# Altium PCB Layout.PcbDoc
Units mil, origin at the board's own origin, x right, y up, seen from the top; angles counter-clockwise.
Board outline 3898.62 x 1890.75 mil, 2 copper layers (Top Layer, Bottom Layer); 102 components, 77 nets, 341 pads, 90 vias.
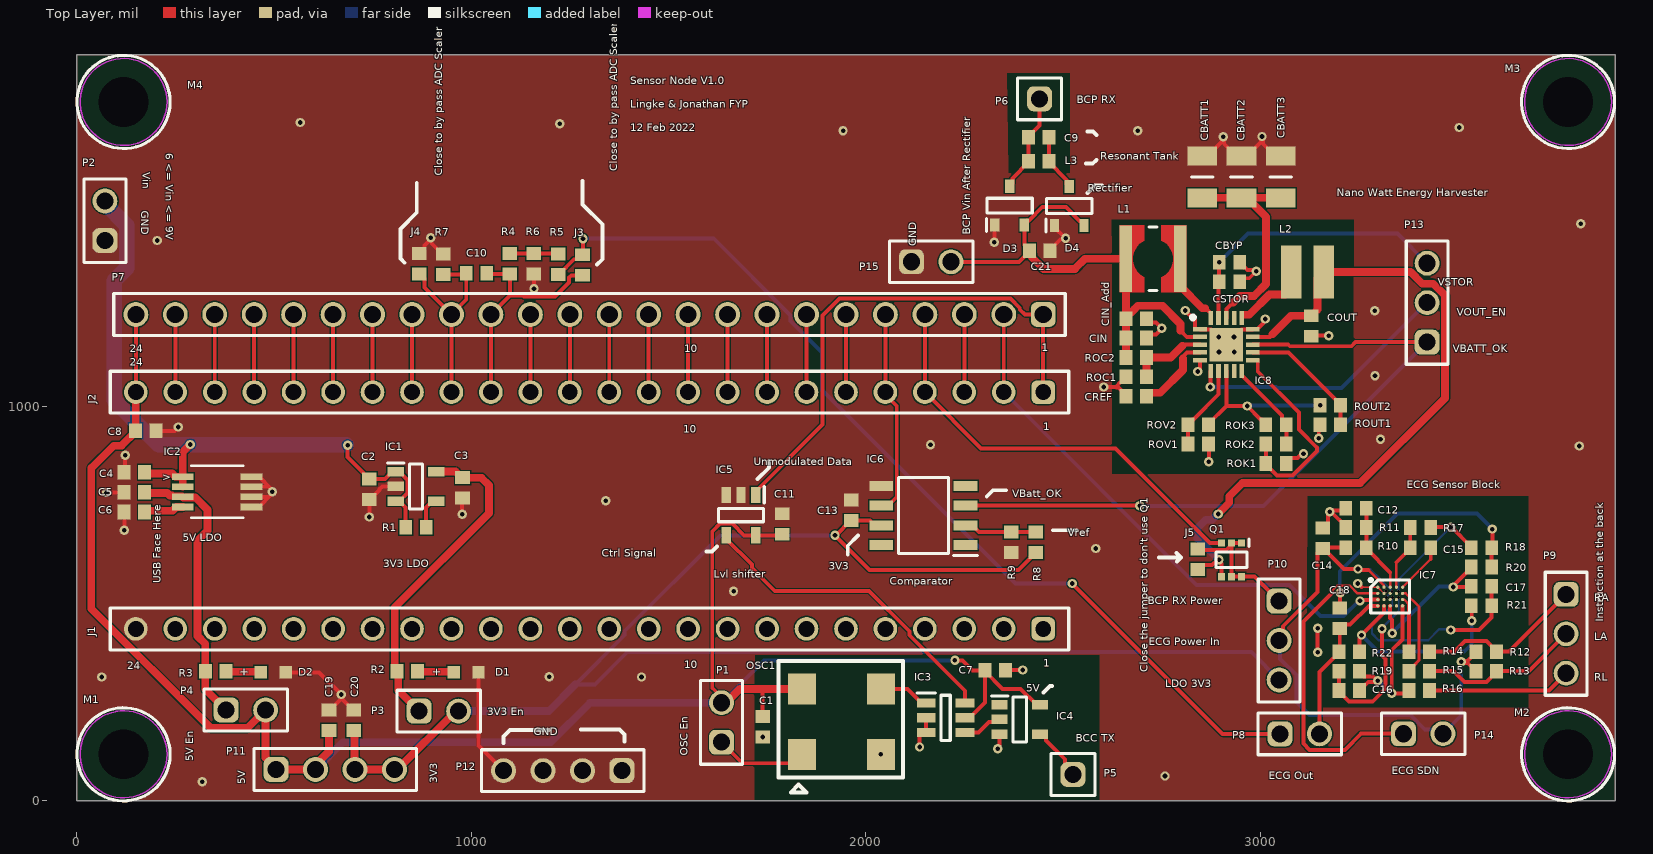
[diagram p0: Top Layer view]
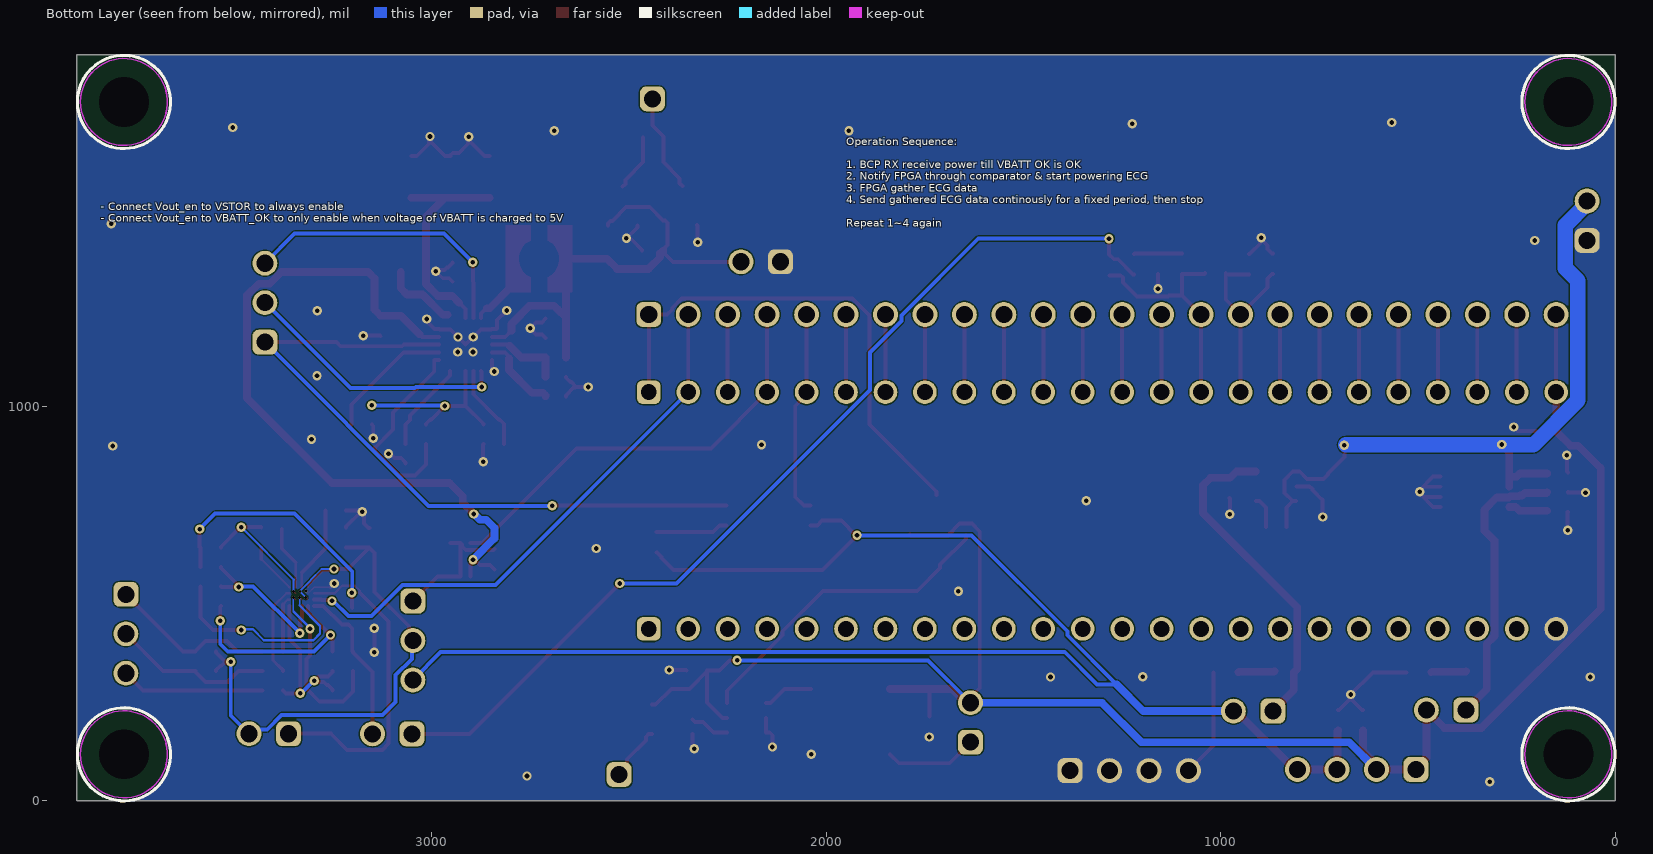
[diagram p1: Bottom Layer view, seen from below]
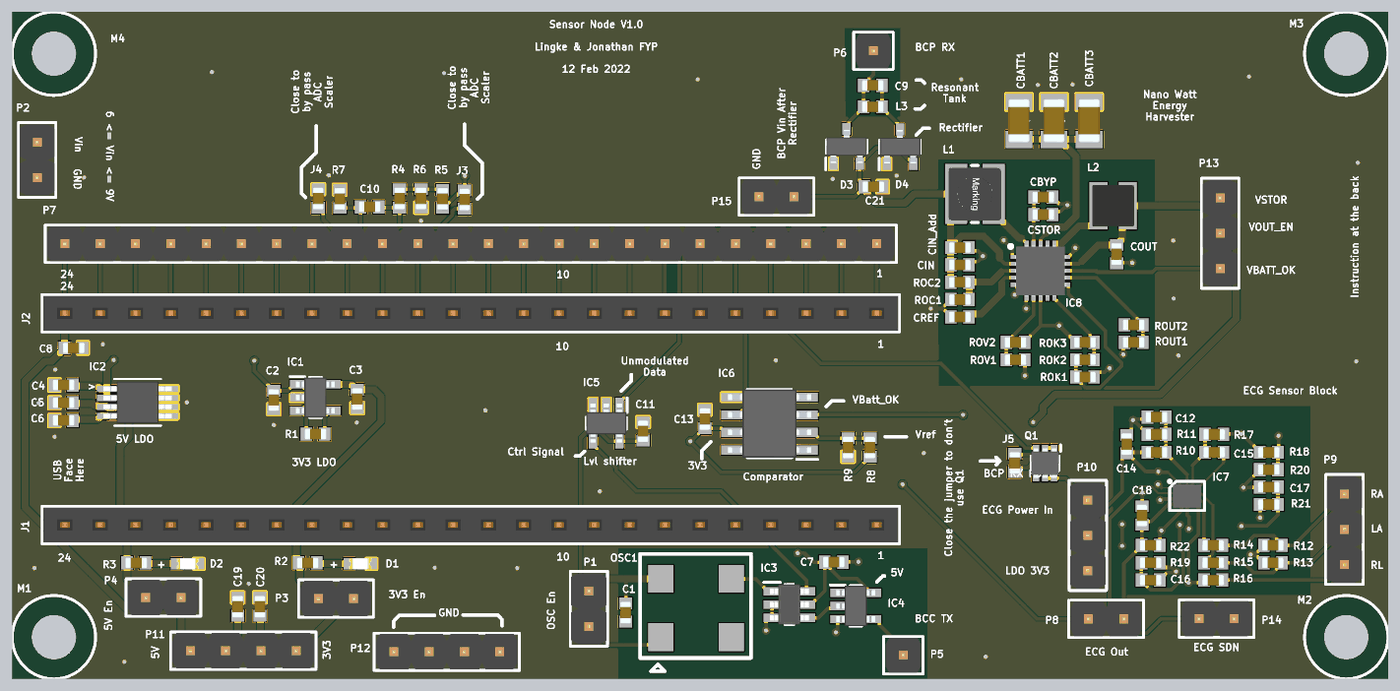
[diagram p2: 3D render of the assembled board from above, using the file's embedded part models]

## Layer stack, top to bottom
Top Solder: solder mask 0.4, Solder Resist, Dk 3.5
Top Layer: signal copper 1.4
Dielectric 1: dielectric 12.6, FR-4, Dk 4.8
Bottom Layer: signal copper 1.4
Bottom Solder: solder mask 0.4, Solder Resist, Dk 3.5

## Board outline
0,1890.75 3898.62,1890.75 3898.62,0 0,0

## Design rules (kind name [scope] priority, off if disabled: settings)
Clearance [All] p1: gap=3 ignorepadtopadclearanceinfootprint=TRUE
HoleSize [All] p1: absolutevalues=TRUE maxlimit=393.7 minlimit=1 maxpercent=80.000 minpercent=20.000
HoleToHoleClearance [All] p1: gap=3.94 allowstackedmicrovias=TRUE
MinimumSolderMaskSliver [All] p1: minsoldermaskwidth=3
PolygonConnect [All] p1: connectstyle=Direct reliefconductorwidth=10 reliefentries=4 polygonreliefangle="90 Angle" airgapwidth=10
RoutingVias [All] p1: holewidth=28 width=50 viastyle="Through Hole" minholewidth=3.94 minwidth=7.87 maxholewidth=28 maxwidth=50
SilkToSilkClearance [All] p1: silktosilkclearance=3.94
SilkToSolderMaskClearance [IsPad] p1: minsilkscreentomaskgap=3.94 clearancetoexposedcopper=TRUE
SolderMaskExpansion [All] p1: expansion=4 istentingtop=FALSE
Width [All] p1: maxlimit=100 minlimit=3 preferedwidth=10
25 further rules are at their usual default settings.

## Components (designator, comment, footprint, x,y, rotation, side; value= is the part's Value field where it differs from the comment)
C1 "0.1uF" 0603 1738.22,187.99 r90 top
C2 "1uF" 0603 741.17,790.35 r270 top
C3 "1uF" 0603 977.33,793.31 r270 top
C4 "1uF" 0603 145.67,832.68 r180 top
C5 "4.7uF" 0603 145.67,782.48 r180 top
C6 "470pF" 0603 145.67,732.28 r180 top
C7 "0.1uF" 0603 2327.76,330.71 r180 top
C8 "0.1uF" 0603 174.21,937.99 r180 top
C9 "220pF" 0603 2437.99,1682.09 r180 top
C10 "1nF" 0603 1012.8,1337.6 r0 top
C11 "0.1uF" 0603 1787.4,701.77 r270 top
C12 "0.1uF" 0603 3242.13,742.13 r0 top
C13 "0.1uF" 0603 1962.6,736.22 r270 top
C14 "0.1uF" 0603 3157.51,665.35 r270 top
C15 "3.3uF" 0603 3405.51,642.1 r0 top
C16 "1nF" 0603 3225.39,279.89 r0 top
C17 "5.6nF" 0603 3560.04,543.67 r180 top
C18 "5.6nF" 0603 3200.79,462.96 r90 top
C19 "0.1uF" 0603 638.78,204.72 r90 top
C20 "0.1uF" 0603 701.77,204.72 r90 top
C21 "0.1uF" 0603 2439.96,1394.69 r0 top
CBATT1 "220uF" 1206 2852.36,1581.69 r90 top
CBATT2 "220uF" 1206 2951.8,1581.69 r90 top
CBATT3 "220uF" 1206 3051.18,1581.69 r90 top
CBYP "0.01uF" 0603 2921.26,1365.16 r180 top
CIN "4.7uF" 0603 2685.04,1173.23 r180 top
CIN_Add "0.1uF" 0603 2685.04,1222.44 r180 top
COUT "22uF" 0603 3128.94,1203.74 r270 top
CREF "10nF" 0603 2685.04,1025.59 r0 top
CSTOR "4.7uF" 0603 2921.26,1315.94 r180 top
D1 "Super Red, 1.9V" WL-SMCW_0603_H=0.7mm 986.22,325.98 r180 top
D2 "Super Red, 1.9V" WL-SMCW_0603_H=0.7mm 497.21,325.98 r180 top
D3 "BAT54S_R1_00001" SOT95P240X110-3N 2364.04,1508.86 r90 top
D4 "BAT54S_R1_00001" SOT95P240X110-3N 2515.38,1507.87 r90 top
IC1 "3V3 LDO" SOT-23-5 859.25,797.24 r0 top
IC2 "5V LDO" MSOP-8_MS 355.31,783.46 r0 top
IC3 "TS5A3160DBVR" SOT-23-6 2201.77,210.63 r0 top
IC4 "SN74LVC1G34DBVRG4" SOT-23-5 2389.76,206.69 r0 top
IC5 "SN74LV1T32DBVRG4" SOT-23-5 1683.07,724.41 r270 top
IC6 "LTC6268IS8#PBF" SOIC127P599X175-8N 2145.67,723.43 r180 top
IC7 "AD8233ACBZ-R7" BGA20C40P5X4_204X170X56 3328.74,518.08 r0 top
IC8 "BQ25570RGRR" QFN50P350X350X100-21N-D 2913.39,1156.5 r0 top
J1 "61302411821" 61302411821 1299.21,436.02 r180 top
J2 "61302411821" 61302411821 1299.21,1036.02 r180 top
J3 "Jumper" 0603 1281.5,1358.27 r90 top
J4 "Jumper" 0603 867.13,1361.22 r90 top
J5 "Jumper" 0603 2840.55,612.2 r270 top
L1 "22uH, 0.51A" WE-TPC_3816 2727.36,1374.02 r270 top
L2 "10uH, 0.85A" WE-MAPI_3015 3119.09,1340.55 r0 top
L3 "75nH" 0603 2437.99,1621.06 r180 top
M1 "M3 Mounting Hole" "M3 Hole" 118.11,118.11 r0 top
M2 "M3 Mounting Hole" "M3 Hole" 3779.53,118.11 r0 top
M3 "M3 Mounting Hole" "M3 Hole" 3779.53,1771.65 r0 top
M4 "M3 Mounting Hole" "M3 Hole" 118.11,1771.65 r0 top
OSC1 "1Mhz Oscillator" CB3-3I-4M0000 1837.6,118.11 r0 top
P1 "61300211121" 61300211121 1633.86,198.82 r90 top
P2 "61300211121" 61300211121 70.87,1470.47 r90 top
P3 "61300211121" 61300211121 917.32,227.59 r0 top
P4 "61300211121" 61300211121 428.15,230.34 r0 top
P5 "61300111121" 61300111121 2524.61,66.93 r0 top
P6 "61300111121" 61300111121 2439.96,1779.53 r0 top
P7 "61302411121" 61302411121 1299.21,1232.87 r180 top
P8 "61300211121" 61300211121 3099.41,169.91 r0 top
P9 "61300311121" 61300311121 3774.61,423.62 r270 top
P10 "61300311121" 61300311121 3047.24,406.5 r270 top
P11 "61300411121" 61300411121 654.72,79.72 r0 top
P12 "61300411121" 61300411121 1231.3,76.77 r180 top
P13 "61300311121" 61300311121 3422.24,1262.8 r90 top
P14 "61300211121" 61300211121 3412.4,170.28 r0 top
P15 "61300211121" 61300211121 2165.35,1366.51 r0 top
Q1 "RAL025P01TCR" RAL025P01TCR 2926.18,611.22 r270 top
R1 "100k Ohm" 0603 859.25,693.9 r0 top
R2 "1k Ohm" 0603 837.2,328.74 r180 top
R3 "1k Ohm" 0603 351.38,328.74 r0 top
R4 "140 Ohm" 0603 1097.44,1361.22 r90 top
R5 "2.32K Ohm" 0603 1219.49,1360.24 r90 top
R6 "1K Ohm" 0603 1158.24,1361.22 r270 top
R7 "845 Ohm" 0603 928.18,1360.24 r90 top
R8 "10k Ohm" 0603 2430.12,655.51 r270 top
R9 "31.6k Ohm" 0603 2368.11,655.51 r270 top
R10 "10M Ohm" 0603 3242.13,642.1 r180 top
R11 "10M Ohm" 0603 3242.13,692.91 r0 top
R12 "10M Ohm" 0603 3571.85,378.32 r180 top
R13 "10M Ohm" 0603 3571.85,329.1 r180 top
R14 "150k Ohm" 0603 3402.56,378.32 r0 top
R15 "150k Ohm" 0603 3402.56,329.1 r0 top
R16 "300k Ohm" 0603 3402.56,279.89 r0 top
R17 "10M Ohm" 0603 3405.51,692.91 r180 top
R18 "499K Ohm" 0603 3560.04,642.1 r180 top
R19 "10M Ohm" 0603 3225.39,329.1 r0 top
R20 "1M Ohm" 0603 3560.04,592.88 r0 top
R21 "1M Ohm" 0603 3560.04,494.46 r180 top
R22 "1M Ohm" 0603 3225.39,378.32 r180 top
ROC1 "15M Ohm" 0603 2685.04,1074.8 r180 top
ROC2 "5M Ohm" 0603 2685.04,1124.02 r0 top
ROK1 "3.09M Ohm" 0603 3039.37,855.32 r180 top
ROK2 "3.32M Ohm" 0603 3039.37,904.53 r0 top
ROK3 "6.49M Ohm" 0603 3039.37,953.74 r180 top
ROUT1 "6.19M Ohm" 0603 3177.17,953.74 r180 top
ROUT2 "6.65M Ohm" 0603 3177.17,1002.95 r180 top
ROV1 "4.53M Ohm" 0603 2842.52,904.53 r0 top
ROV2 "8.45M Ohm" 0603 2842.52,953.74 r0 top

## Footprints (in the part's own frame and the unit in brackets; to place one, negate y for a bottom-side part, rotate by r counter-clockwise, add the part's x,y. Pads: shape width x height; smd on the part's side, far side on the other; paste and mask are expansions set on the pad)
0603 [mm]
  rect 0.83x0.94 smd: 1(-0.66,0) 2(0.66,0)
  body extent -0.8,-0.4 0.8,0.4, height 0.9
1206 [mm]
  rect 1.22x1.92 smd: 1(-1.35,0) 2(1.35,0)
  silkscreen extent 0,-0.7 0,0.7, body extent -1.6,-0.8 1.6,0.8, height 1.9
61300111121 [mm] "Pin Header, pitch 2.54 mm, THT, Vertical, single row, 1p"
  rrect50% 1.6x1.6 hole 1.1: 1(0,0)
  silkscreen extent -1.42,-1.35 1.42,1.35, body extent -1.27,-1.27 1.27,1.27, height 8.57
61300211121 [mm] "Pin Header, pitch 2.54 mm, THT, Vertical, single row, 2p"
  rrect50% 1.6x1.6 hole 1.1: 1(-1.27,0)
  round 1.6 hole 1.1: 2(1.27,0)
  silkscreen extent -2.69,-1.35 2.69,1.35, body extent -2.54,-1.27 2.54,1.27, height 8.57
61300311121 [mm] "Pin Header, pitch 2.54 mm, THT, Vertical, single row, 3p"
  rrect50% 1.6x1.6 hole 1.1: 1(-2.54,0)
  round 1.6 hole 1.1: 2(0,0) 3(2.54,0)
  silkscreen extent -3.96,-1.35 3.96,1.35, body extent -3.81,-1.27 3.81,1.27, height 8.57
61300411121 [mm] "Pin Header, pitch 2.54 mm, THT, Vertical, single row, 4p"
  rrect50% 1.6x1.6 hole 1.1: 1(-3.81,0)
  round 1.6 hole 1.1: 2(-1.27,0) 3(1.27,0) 4(3.81,0)
  silkscreen extent -5.23,-1.35 5.23,1.35, body extent -5.08,-1.27 5.08,1.27, height 8.57
61302411121 [mm] "Pin Header, pitch 2.54 mm, THT, Vertical, single row, 24p"
  rrect50% 1.6x1.6 hole 1.1: 1(-29.21,0)
  round 1.6 hole 1.1: 2(-26.67,0) 3(-24.13,0) 4(-21.59,0) 5(-19.05,0) 6(-16.51,0) 7(-13.97,0) 8(-11.43,0) 9(-8.89,0) 10(-6.35,0) 11(-3.81,0) 12(-1.27,0) 13(1.27,0) 14(3.81,0) 15(6.35,0) 16(8.89,0) 17(11.43,0) 18(13.97,0) 19(16.51,0) 20(19.05,0) 21(21.59,0) 22(24.13,0) 23(26.67,0) 24(29.21,0)
  silkscreen extent -30.63,-1.35 30.63,1.35, body extent -30.48,-1.27 30.48,1.27, height 8.57
61302411821 [mm] "Socket Header, Pitch 2.54 mm, THT, Vertical, single row, 24p"
  rrect50% 1.52x1.52 hole 1.02: 1(-29.21,0)
  round 1.52 hole 1.02: 2(-26.67,0) 3(-24.13,0) 4(-21.59,0) 5(-19.05,0) 6(-16.51,0) 7(-13.97,0) 8(-11.43,0) 9(-8.89,0) 10(-6.35,0) 11(-3.81,0) 12(-1.27,0) 13(1.27,0) 14(3.81,0) 15(6.35,0) 16(8.89,0) 17(11.43,0) 18(13.97,0) 19(16.51,0) 20(19.05,0) 21(21.59,0) 22(24.13,0) 23(26.67,0) 24(29.21,0)
  silkscreen extent -30.86,-1.35 30.86,1.35, body extent -30.73,-1.25 30.73,1.25, height 8.55
BGA20C40P5X4_204X170X56 [mm]
  round 0.208 smd mask+0: A1(-0.8,0.6) A2(-0.4,0.6) A3(0,0.6) A4(0.4,0.6) A5(0.8,0.6) B1(-0.8,0.2) B2(-0.4,0.2) B3(0,0.2) B4(0.4,0.2) B5(0.8,0.2) C1(-0.8,-0.2) C2(-0.4,-0.2) C3(0,-0.2) C4(0.4,-0.2) C5(0.8,-0.2) D1(-0.8,-0.6) D2(-0.4,-0.6) D3(0,-0.6) D4(0.4,-0.6) D5(0.8,-0.6)
  silkscreen extent -1.35,-1.05 1.25,1.15, body extent -1.02,-0.85 1.02,0.85, height 0.56
CB3-3I-4M0000 [mm]
  rect 1.8x2 smd: 1(0,0) 2(5.08,0) 3(5.08,4.2) 4(0,4.2)
  silkscreen extent -1.5,-2.45 6.5,6
"M3 Hole" [mm]
  round 0 hole 3.2 unplated mask+0.1: 1(0,0)
  Keep-Out Layer circle w0.1: c0,0 r2.8
  silkscreen extent -3,-3 3,3
MSOP-8_MS [mil]
  rect 55x17 smd mask+4.72: 1(-87,38.39) 2(-87,12.8) 3(-87,-12.8) 4(-87,-38.39) 5(87,-38.39) 6(87,-12.8) 7(87,12.8) 8(87,38.39)
  silkscreen extent -66,-66 66,66, body extent -96,-59 96,59, height 43
QFN50P350X350X100-21N-D [mm]
  rect 0.9x0.3 smd: 1(-1.7,1) 2(-1.7,0.5) 3(-1.7,0) 4(-1.7,-0.5) 5(-1.7,-1) 11(1.7,-1) 12(1.7,-0.5) 13(1.7,0) 14(1.7,0.5) 15(1.7,1)
  rect 0.3x0.9 smd: 6(-1,-1.7) 7(-0.5,-1.7) 8(0,-1.7) 9(0.5,-1.7) 10(1,-1.7) 16(1,1.7) 17(0.5,1.7) 18(0,1.7) 19(-0.5,1.7) 20(-1,1.7)
  rect 2.15x2.15 smd: 21(0,0)
  silkscreen extent -2.27,1.63 -2.02,1.87, body extent -1.8,-1.8 1.8,1.8, height 1
RAL025P01TCR [mm]
  rect 0.47x0.45 smd: 1(-1.085,0.65) 2(-1.085,0) 3(-1.085,-0.65) 4(1.085,-0.65) 5(1.085,0) 6(1.085,0.65)
  silkscreen extent -1.32,-1 0.5,1.12, body extent -1.05,-1 1.05,1, height 0.85
SOIC127P599X175-8N [mm]
  rect 1.526x0.65 smd: 1(-2.712,1.905) 2(-2.712,0.635) 3(-2.712,-0.635) 4(-2.712,-1.905) 5(2.712,-1.905) 6(2.712,-0.635) 7(2.712,0.635) 8(2.712,1.905)
  silkscreen extent -3.47,-2.45 1.6,2.58, body extent -3,-2.45 3,2.45, height 1.75
SOT95P240X110-3N [mm]
  rect 0.85x0.6 smd: 1(-1.25,0.95) 2(-1.25,-0.95) 3(1.25,0)
  silkscreen extent -1.68,-1.46 0.48,1.5, body extent -1.2,-1.46 1.2,1.46, height 1.1
SOT-23-5 [mm]
  rect 1.05x0.6 smd: 1(-1.3,0.95) 2(-1.3,0) 3(-1.3,-0.95) 4(1.3,-0.95) 5(1.3,0.95)
  silkscreen extent -1.83,-1.45 0.43,1.5, body extent -1.4,-1.45 1.4,1.45, height 1
SOT-23-6 [mm]
  rect 1.2x0.6 smd: 1(-1.25,0.95) 2(-1.25,0) 3(-1.25,-0.95) 4(1.25,-0.95) 5(1.25,0) 6(1.25,0.95)
  silkscreen extent -1.85,-1.45 0.3,1.6, body extent -1.4,-1.45 1.4,1.45, height 1.2
WE-MAPI_3015 [mm] "SMT Shielded Power Inductor, body 3x3mm"
  rect 1.3x3.4 smd: 1(-1.05,0) 2(1.05,0)
  body extent -1.5,-1.5 1.5,1.5, height 1.5
WE-TPC_3816 [mm] "Power Inductor, SMD, 2-Leads, body 3.8x3.8mm"
  rect 4.3x0.8 smd paste-403.566 mask-403.566: 1(0,1.75) 2(0,-1.75)
  Top Layer region: 2.15,-0.55 2.15,-2.15 -2.15,-2.15 -2.15,-0.55 -1.178,-0.55 -1.178,-0.55 -0.818,-1.01 -0.293,-1.267 0.292,-1.267 0.818,-1.011 1.178,-0.55 1.178,-0.55 1.178,-0.55
  Top Layer region: -2.15,0.55 -2.15,2.15 2.15,2.15 2.15,0.55 1.178,0.55 1.178,0.55 0.818,1.01 0.293,1.267 -0.292,1.267 -0.818,1.011 -1.178,0.55 -1.178,0.55 -1.178,0.55
  silkscreen extent -2.05,-0.25 2.05,0.25, body extent -1.9,-1.9 1.9,1.9, height 1.65
WL-SMCW_0603_H=0.7mm [mm] "SMD Mono-color Chip LED, body 1.6x0.8mm"
  rect 0.8x0.8 smd: 1(-0.8,0) 2(0.8,0)
  body extent -0.8,-0.4 0.8,0.4, height 0.7

## Part data
C1 C2 C3 C4 C5 C6 C7 C8 C9 C10 C11 C12 C13 C14 C15 C16 C17 C18 C19 C20 C21 CBYP CIN CIN_Add COUT CREF CSTOR: library part Capacitor_0603, "Capacitor"
CBATT1 CBATT2 CBATT3: library part Capacitor_1206, "Capacitor"
D1 D2: library part 150060SS75000, "WL-SMCW SMT Mono-color Chip LED Waterclear, size 0603, Super Red, 1.9V, 140deg", Emitting Color="Super Red", Forward Voltage typ.=1.9V, Operating Temperature="-40 to +85degC", Chip Technology=AlInGaP, ComponentLink1Description=Manufacturer, ComponentLink1URL=http://www.we-online.de, ComponentLink2Description=Datasheet, ComponentLink2URL=https://www.we-online.com/catalog/datasheet/150060SS75000.pdf, Dominant Wavelength typ.=630nm, Luminous Intensity typ.=60mcd, Mounting Technology=SMT, Packaging="Tape and Reel", Part Number=150060SS75000, Peak Wavelength typ.=645nm, Published Date="December 2019", Publisher="Wurth Elektronik", Size=0603, Viewing Angle=140deg
D3 D4: "Schottky Diode", Manufacturer_Name=PANJIT, Datasheet Link=https://www.mouser.tw/datasheet/2/1057/BAT54_SERIES-1868754.pdf, Height=1.1mm, Manufacturer_Part_Number=BAT54S_R1_00001
IC1: library part MIC5216-3.3YM5-TR, "Power Supply", Manufacturer_Name=Microchip, Manufacturer_Part_Number=MIC5317-3.3YM5-TR, Mouser2 Part Number=998-MIC5317-3.3YM5TR, Datasheet Link=https://componentsearchengine.com//MIC5317-3.3YM5-TR.pdf, Height=1mm, Mouser2 Price/Stock=https://www.mouser.com/Search/Refine.aspx?Keyword=998-MIC5317-3.3YM5TR
IC2: library part MIC5219-5.0YMM-TR
IC3: "Integrated Circuit", Manufacturer_Name="Texas Instruments", Mouser2 Part Number=595-TS5A3160DBVR, Datasheet Link=http://www.ti.com/lit/gpn/ts5a3160, Height=1.45mm, Manufacturer_Part_Number=TS5A3160DBVR, Mouser2 Price/Stock=https://www.mouser.com/Search/Refine.aspx?Keyword=595-TS5A3160DBVR
IC4: Supplier Part Number 1=595-74LVC1G125DBVRG4, Supplier 1=Mouser
IC5: Supplier Part Number 1=595-SN74LV1T32DBVRG4, Supplier 1=Mouser
IC6: "Integrated Circuit", Manufacturer_Name="Linear Technology", Mouser2 Part Number=584-LTC6268IS8#PBF, Datasheet Link=https://componentsearchengine.com//LTC6268IS8#PBF.pdf, Height=1.752mm, Manufacturer_Part_Number=LTC6268IS8#PBF, Mouser2 Price/Stock=https://www.mouser.com/Search/Refine.aspx?Keyword=584-LTC6268IS8%23PBF
IC7: "Integrated Circuit", Manufacturer_Name="Analog Devices", Datasheet Link=https://componentsearchengine.com/Datasheets/2/AD8233ACBZ-R7.pdf, Height=0.56mm, Manufacturer_Part_Number=AD8233ACBZ-R7
IC8: "Integrated Circuit", Manufacturer_Name="Texas Instruments", Mouser2 Part Number=595-BQ25570RGRR, Datasheet Link=http://www.ti.com/lit/gpn/bq25570, Height=1mm, Manufacturer_Part_Number=BQ25570RGRR, Mouser2 Price/Stock=https://www.mouser.com/Search/Refine.aspx?Keyword=595-BQ25570RGRR
J1 J2: "WR-PHD Socket Header, THT, pitch 2.54mm, Single Row, Vertical, 24p", Contact Resistance=20mOhm, Manufacturer="Wurth Elektronik", Operating Temperature="-40 to +125degC", Rated Current=3A, Withstanding Voltage=500VAC, Working Voltage=250VAC, ComponentLink1Description=Manufacturer, ComponentLink1URL=http://www.we-online.de, ComponentLink2Description=Datasheet, ComponentLink2URL=https://www.we-online.com/catalog/datasheet/61302411821.pdf, Gender="Socket Header", Manufacturer Part Number=61302411821, Mounting Technology=THT, Orientation=Vertical, Packaging=Tray, Pin Number=24, Pitch=2.54mm, Row Number=Single
J3 J4 J5: library part 0603_Jumper, "Capacitor"
L1: library part 744031220, "WE-TPC SMT Tiny Power Inductor, size 3816, 22uH, 0.51A, 450mOhm", DC Resistance max.=450mOhm, DC Resistance typ.=410mOhm, Inductance=22uH, Manufacturer="Wurth Elektronik", Operating Temperature max.=125C, Operating Temperature min.=-40C, Rated Current=0.51A, Saturation Current=0.36A, Self Resonant Frequency=26MHz, ComponentLink1Description="Manufacturer Link", ComponentLink1URL=http://www.we-online.de, ComponentLink2Description=Datasheet, ComponentLink2URL=https://www.we-online.com/catalog/datasheet/744031220.pdf, Height=1.65mm, Length=3.8mm, Manufacturer Part Number=744031220, Mounting Technology=SMT, Packaging="Tape and Reel", Size=3816, Width=3.8mm
L2: library part 74438335100, "WE-MAPI SMT Power Inductor, size 3015, 10uH, 0.85A", DC Resistance max.=513mOhm, DC Resistance typ.=446mOhm, Inductance=10uH, Manufacturer="Wurth Elektronik", Operating Temperature="-40 to +125degC", Rated Current=0.85A, Saturation Current=2A, Self Resonant Frequency=21MHz, ComponentLink1Description=Manufacturer, ComponentLink1URL=http://www.we-online.de, ComponentLink2Description=Datasheet, ComponentLink2URL=https://www.we-online.com/catalog/datasheet/74438335100.pdf, Height=1.5mm, Length=3mm, Manufacturer Part Number=74438335100, Mounting Technology=SMT, Packaging="Tape and Reel", Size=3015, Width=3mm
L3: library part Inductor_0603, "Inductor"
M1 M2 M3 M4: library part M3_Mounting_hole
OSC1: library part LFSPXO053327Bulk
P1 P2 P3 P4 P8 P14 P15: "WR-PHD Pin Header, THT, pitch 2.54mm, Single Row, Vertical, 2p", Contact Resistance=20mOhm, Manufacturer="Wurth Elektronik", Operating Temperature="-40 to +105degC", Rated Current=3A, Withstanding Voltage=500VAC, Working Voltage=250VAC, ComponentLink1Description=Manufacturer, ComponentLink1URL=http://www.we-online.de, ComponentLink2Description=Datasheet, ComponentLink2URL=https://www.we-online.com/catalog/datasheet/61300211121.pdf, Gender="Pin Header", Manufacturer Part Number=61300211121, Mounting Technology=THT, Orientation=Vertical, Packaging=Bag, Pin Number=2, Pitch=2.54mm, Row Number=Single
P5 P6: "WR-PHD Pin Header, THT, pitch 2.54mm, Single Row, Vertical, 1p", Contact Resistance=20mOhm, Manufacturer="Wurth Elektronik", Operating Temperature="-40 to +105degC", Rated Current=3A, Withstanding Voltage=500VAC, Working Voltage=250VAC, ComponentLink1Description=Manufacturer, ComponentLink1URL=http://www.we-online.de, ComponentLink2Description=Datasheet, ComponentLink2URL=https://www.we-online.com/catalog/datasheet/61300111121.pdf, Gender="Pin Header", Manufacturer Part Number=61300111121, Mounting Technology=THT, Orientation=Vertical, Packaging=Bag, Pin Number=1, Pitch=2.54mm, Row Number=Single
P7: "WR-PHD Pin Header, THT, pitch 2.54mm, Single Row, Vertical, 24p", Contact Resistance=20mOhm, Manufacturer="Wurth Elektronik", Operating Temperature="-40 to +105degC", Rated Current=3A, Withstanding Voltage=500VAC, Working Voltage=250VAC, ComponentLink1Description=Manufacturer, ComponentLink1URL=http://www.we-online.de, ComponentLink2Description=Datasheet, ComponentLink2URL=https://www.we-online.com/catalog/datasheet/61302411121.pdf, Gender="Pin Header", Manufacturer Part Number=61302411121, Mounting Technology=THT, Orientation=Vertical, Packaging=Bag, Pin Number=24, Pitch=2.54mm, Row Number=Single
P9 P10 P13: "WR-PHD Pin Header, THT, pitch 2.54mm, Single Row, Vertical, 3p", Contact Resistance=20mOhm, Manufacturer="Wurth Elektronik", Operating Temperature="-40 to +105degC", Rated Current=3A, Withstanding Voltage=500VAC, Working Voltage=250VAC, ComponentLink1Description=Manufacturer, ComponentLink1URL=http://www.we-online.de, ComponentLink2Description=Datasheet, ComponentLink2URL=https://www.we-online.com/catalog/datasheet/61300311121.pdf, Gender="Pin Header", Manufacturer Part Number=61300311121, Mounting Technology=THT, Orientation=Vertical, Packaging=Bag, Pin Number=3, Pitch=2.54mm, Row Number=Single
P11 P12: "WR-PHD Pin Header, THT, pitch 2.54mm, Single Row, Vertical, 4p", Contact Resistance=20mOhm, Manufacturer="Wurth Elektronik", Operating Temperature="-40 to +105degC", Rated Current=3A, Withstanding Voltage=500VAC, Working Voltage=250VAC, ComponentLink1Description=Manufacturer, ComponentLink1URL=http://www.we-online.de, ComponentLink2Description=Datasheet, ComponentLink2URL=https://www.we-online.com/catalog/datasheet/61300411121.pdf, Gender="Pin Header", Manufacturer Part Number=61300411121, Mounting Technology=THT, Orientation=Vertical, Packaging=Bag, Pin Number=4, Pitch=2.54mm, Row Number=Single
Q1: "MOSFET (P-Channel)", Manufacturer_Name="ROHM Semiconductor", Datasheet Link=https://componentsearchengine.com/Datasheets/2/RAL025P01TCR.pdf, Height=0.85mm, Manufacturer_Part_Number=RAL025P01TCR
R1 R2 R3 R4 R5 R6 R7 R8 R9 R10 R11 R12 R13 R14 R15 R16 R17 R18 R19 R20 R21 R22 ROC1 ROC2 ROK1 ROK2 ROK3 ROUT1 ROUT2 ROV1 ROV2: library part Resistor, "Resistor"

## Via types
v1: diameter 23.62, hole 11.81, Top Layer to Bottom Layer, 84 vias
v2: diameter 7.87, hole 7.87, Top Layer to Bottom Layer, 6 vias

## Nets (pads, with @x,y where several pads share a name; then routed paths per layer and width w, separated by ;. In a path a pad name is that pad's centre, name@x,y a point inside that pad or via, vN(x,y) a via of type N, cw(c..) or ccw(c..) an arc to the next point about the centre after c; other vN are vias at no path point)
ADx_N: C10.1 J2.16 J4.1 P7.16 R7.1 | length 514.8
  Top Layer w10: J4.1 869.29,1335.24 880.63,1323.9 880.63,1301.46 P7.16 ; R7.1 983.46,1334.25 C10.1 986.81,1270.47 P7.16 ; J2.16 P7.16
ADx_P: C10.2 J2.15 J3.1 P7.15 R4.1 | length 593.5
  Top Layer w10: C10.2 1041.14,1335.24 R4.1 1097.44,1281.1 ; J2.15 P7.15 1097.44,1281.1 ; J3.1 1252.85,1332.28 1246.99,1326.43 1246.99,1314.19 1211.22,1278.42 1133.4,1278.42 1130.71,1281.1 1097.44,1281.1
"BCC 3V3": C13.2 C20.1 IC6.7 P3.2 P10.3 P11.3 P11.4 R8.2 | length 4118.3
  Top Layer w10: IC6.7 2021.65,698.43 2009.84,710.24 C13.2 1960.43,710.24 1923.43,673.23 v1(1921.36,673.23) 2008.96,585.63 2386.22,585.63 2416.61,616.02 2416.61,618.19 2427.95,629.53 R8.2
  Top Layer w19.68: C20.1 703.25,177.26 703.25,81.2 P11.3 P11.4 812.09,79.72 959.96,227.59 P3.2
  Bottom Layer w10: v1(1921.36,673.23) 1631.37,673.23 1388.13,429.99 1388.13,419.9 1263.15,294.92 1312.64,294.92 1394.83,377.11 2976.63,377.11 P10.3
  Bottom Layer w19.68: P3.2 1195.82,227.59 1263.15,294.92
"BCC 5V": C1.2 C7.2 C8.2 C11.2 C19.1 IC3.5 IC4.5 IC5.5 J2.24 OSC1.4 P1.2 P4.2 P7.24 P11.1 P11.2 | length 4840.7
  Top Layer w10: J2.24 P7.24 ; P1.2 1633.86,263.16 1610.29,286.73 1610.29,683.06 1630.13,702.9 1661.21,702.9 1690.88,673.23 IC5.5 1784.84,673.23 C11.2 ; 1734.25,283.46 1738.22,279.5 C1.2 ; v1(2225.39,356.3) 2244.09,356.3 2269.68,330.71 C7.2 C7.2@2301.77,328.54 ; IC3.5 2262.8,210.63 2301.77,249.61 C7.2@2301.77,328.54 ; IC4.5 2432.09,244.09 2392.13,284.06 2346.26,284.06 C7.2@2301.77,328.54
  Top Layer w19.68: J2.24 148.72,1035.53 148.72,938.48 C8.2 148.23,935.83 112.6,900.2 93.11,900.2 36.42,843.5 36.42,486.93 338.34,185.01 432.81,185.01 P4.2 478.15,109.5 504.72,82.92 P11.1 P11.2 604.72,91.44 638.78,125.5 C19.1 ; P1.2 1645.58,248.82 1680.22,283.46 1734.25,283.46 OSC1.4
  Bottom Layer w10: P1.2 1741.34,356.3 v1(2225.39,356.3)
  Bottom Layer w19.68: P11.2 673.62,148.62 1200.44,148.62 1300.64,248.82 P1.2
"BCP Power Good": IC6.6 J2.5 P7.5 | length 522.6
  Top Layer w10: IC6.6 2056.14,748.43 2077.94,770.22 2077.94,1001.22 2049.21,1029.94 J2.5 P7.5
"BCP RX Power Out": COUT.1 IC8.14 J5.2 L2.2 Q1.4 | length 1860.7
  Top Layer w10: J5.2 2851.89,597.56 2877.34,597.56 2891,611.22 v1(2894.68,611.22) 2894.68,607.53 2900.59,601.63 Q1.4 ; IC8.14 3023.62,1176.18 3030.51,1183.07
  Top Layer w19.68: v1(2892.72,727.22) 2892.72,728.29 2920.47,756.04 2920.47,771.85 2954.58,805.96 3252.81,805.96 3467.58,1020.73 3467.58,1281.58 3438.09,1311.06 3409.86,1311.06 3380.37,1340.55 L2.2 3144.68,1324.8 3144.68,1245.47 COUT.1@3137.6,1238.39 ; 3030.51,1183.07 3077.17,1229.72 COUT.1
  Bottom Layer w19.68: v1(2892.72,727.22) 2891.65,727.22 2876.98,712.55 2861.17,712.55 2840.55,691.93 2840.55,665.35 v1(2894.68,611.22)
"BCP Vin": C21.1 CIN.2 CIN_Add.2 D3.2 D4.2 IC8.2 L1.2 P15.2 ROC2.1 | length 1245.2
  Top Layer w10: P15.2 2387.96,1366.51 2407.71,1386.25 2407.71,1403.12 2401.44,1409.39 D3.2 2401.44,1464.57 2408.25,1471.38 2413.17,1471.38 2446.71,1504.92 2506.53,1504.92 2541.05,1470.39 2545.97,1470.39 2552.79,1463.58 D4.2 ; 2797.24,1191.93 2812.99,1176.18 IC8.2
  Top Layer w19.68: C21.1 2420.47,1388.19 2420.47,1377.76 2449.8,1348.43 2529.53,1348.43 2555.12,1374.02 L1.2 2658.76,1373.72 CIN_Add.2@2658.76,1224.31 ; ROC2.1 CIN.2 CIN_Add.2 2658.76,1222.74 CIN_Add.2@2658.76,1224.31 ; 2797.24,1191.93 2797.24,1208.94 2751.4,1254.79 2688.95,1254.79 2679.47,1245.31 2679.47,1245.02 CIN_Add.2@2658.76,1224.31
"Control Signal": IC3.6 IC5.4 | length 816
  Top Layer w10: IC5.4 1645.67,664.37 1710.59,599.45 1710.59,590.59 1768.7,532.48 2007.8,532.48 2110.29,429.99 2110.29,419.9 2250.98,279.21 IC3.6
"ECG Analog Output": C18.1 IC7.D1 P8.2 R22.2 | length 408.9
  Top Layer w10: P8.2 3149.41,326.67 3187.55,364.81 3188.07,364.81 3199.41,376.15 R22.2 3200.79,379.69 C18.1 3210.46,446.65 3227.17,446.65 3274.97,494.46 IC7.D1
"ECG LOD": IC7.C1 J2.2 P7.2 | length 1397.5
  Top Layer w10: J2.2 P7.2 ; v1(3252.33,506.89) 3254.94,509.5 3278.62,509.5 3279.33,510.21 IC7.C1
  Bottom Layer w10: J2.2 2838.24,546.99 3073.24,546.99 3152.1,468.14 3210.26,468.14 3249.02,506.89 v1(3252.33,506.89)
"ECG Power IN": C14.2 IC7.A2 IC7.B3 IC7.C2 P10.2 P14.2 R10.2 R12.2 R13.2 | length 1563.7
  Top Layer w4: IC7.C2 3313.17,510.21 v2(3318.72,515.75) ; IC7.B3 3328.74,526.06 3333.66,530.99 v2(3333.66,531.09)
  Top Layer w6: 3273.75,584.99 3312.99,545.75 IC7.A2
  Top Layer w10: P10.2 3056.83,416.09 3056.83,442.66 3144.01,529.83 3144.01,628.03 C14.2@3158.07,642.1 ; R10.2 C14.2@3158.07,642.1 ; 3273.75,584.99 3249.63,584.99 v1(3247.05,587.6) 3211.47,587.58 3158.07,640.97 C14.2@3158.07,642.1 ; R13.2 3545.87,331.27 3534.53,342.61 3532.36,342.61 3525.21,349.76 3511.46,349.76 v1(3508.86,352.36) 3511.46,354.97 3524.68,354.97 3545.87,376.15 R12.2
  Bottom Layer w4: 3278.54,587.6 3305.73,560.41 3305.73,559.02 v2(3333.66,531.09)
  Bottom Layer w5: v1(3247.05,587.6) 3278.54,587.6 ; v2(3318.72,515.75) 3318.72,516.15 v2(3333.66,531.09)
  Bottom Layer w10: P10.2 3049.6,404.14 3049.6,360 3090.7,318.9 3090.7,250.84 3124.02,217.52 3380.24,217.52 3417.34,180.42 3452.26,180.42 P14.2 3508.86,216.73 v1(3508.86,352.36)
"ECG Power On": J2.4 P7.4 Q1.3 | length 1106.5
  Top Layer w10: P7.4 J2.4 2291.54,893.7 2632.61,893.7 2872.37,653.94 Q1.3
"ECG SDN": IC7.B1 P14.1 | length 823.5
  Top Layer w6: 3181.96,527.7 3181.96,532.94 3194.39,545.37 3226.69,545.37 3246.1,525.95 IC7.B1
  Top Layer w10: 3181.96,527.7 3108.91,454.66 3108.91,145.02 3124.52,129.41 3214.25,129.41 3255.11,170.28 P14.1
GND: C1.1 C2.2 C3.2 C4.2 C5.2 C6.2 C7.1 C8.1 C11.1 C12.1 C13.1 C14.1 C19.2 C20.2 C21.2 CBATT1.2 CBATT2.2 CBATT3.2 CBYP.1 CIN.1 CIN_Add.1 COUT.2 CREF.1 CSTOR.1 D1.1 D2.1 D3.1 D4.1 IC1.2 IC2.5 IC2.6 IC2.7 IC2.8 IC3.2 IC3.3 IC4.3 IC5.2 IC5.3 IC6.5 IC7.A1 IC7.B2 IC8.1 IC8.5 IC8.15 IC8.21 J1.24 J4.2 OSC1.2 P2.1 P12.1 P12.2 P12.3 P12.4 P15.1 R6.2 R7.2 R9.2 R11.1 ROC1.2 ROK1.1 ROUT1.2 ROV1.2 | length 3003.9
  Top Layer w4: 3255.54,541.7 IC7.A1 IC7.B2 ; IC7.B2@3313.04,525.95 v2(3318.79,531.66)
  Top Layer w10: v1(74.8,781.5) 118.7,781.5 C5.2 ; C6.2 120.08,731.89 v1(120.08,686.02) ; C4.2 122.05,835.04 v1(122.05,875.98) ; C8.1 247.05,937.99 v1(256.89,947.83) ; IC2.5 461.31,745.08 492.47,776.24 492.47,780.86 v1(495.08,783.46) 492.47,786.07 492.47,790.69 461.31,821.85 IC2.8 ; IC2.6 482.28,770.67 ; IC2.7 482.28,796.26 ; D2.1 613.98,325.98 v1(670.28,269.68) 667.67,267.08 667.67,257.43 640.94,230.71 C19.2 ; v1@671.26,268.7 672.88,267.08 672.88,257.43 699.61,230.71 C20.2 ; v1(741.14,719.49) C2.2 ; C2.2 743.34,764.37 766.97,788.01 766.97,790.17 774.05,797.24 IC1.2 ; J4.2 869.29,1387.2 880.63,1398.54 880.63,1407.46 896.65,1423.48 v1(896.65,1427.17) 899.26,1424.56 899.26,1412.97 926.01,1386.22 R7.2 ; v1(976.38,726.38) 976.38,766.37 C3.2 ; D1.1 1017.72,140.35 P12.4 ; R6.2 1158.46,1335.01 v1(1158.46,1298.23) ; v1(2135.83,136.81) 2135.83,166.42 2142.64,173.23 IC3.3 IC3.2 ; v1(2324.8,1416.34) 2325.72,1417.25 2325.72,1458.73 D3.1 ; v1(2333.66,131.89) 2333.66,135.58 2338.58,140.5 IC4.3 ; C7.1 2354.72,331.69 v1(2397.64,331.69) ; C21.2 2465.94,1396.85 2492.67,1423.57 2503.3,1423.57 v1(2505.91,1426.18) 2505.54,1426.18 2477.98,1453.74 D4.1 ; v1(2602.36,1049.21) 2633.46,1049.21 ; CREF.1 2659.06,1027.76 2639.51,1047.3 2635.38,1047.3 2633.46,1049.21 ; ROC1.2 2659.06,1072.64 2647.72,1061.3 2645.55,1061.3 2633.46,1049.21 ; CIN.1 2720.4,1182.61 2734.77,1182.61 v1(2750,1197.83) 2734.77,1213.06 2720.4,1213.06 CIN_Add.1 ; v1(2809.06,1243.11) 2833.74,1218.43 2833.74,1196.77 2834.65,1195.87 IC8.1 2847.36,1194.96 2874.92,1194.96 IC8.21 2951.85,1194.96 2979.41,1194.96 IC8.15 2992.13,1195.87 3011.81,1215.55 v1(3011.81,1221.46) ; v1(2840.55,1088.58) 2846.46,1094.49 IC8.5 ; CBATT1.2 2866.14,1634.84 2902.91,1671.61 2902.91,1680.46 v1(2905.51,1683.07) 2908.12,1680.46 2908.12,1664.75 2930.15,1642.72 2945.87,1642.72 2951.8,1636.78 CBATT2.2 2965.58,1634.84 3001.33,1670.59 3001.33,1681.45 v1(3003.94,1684.06) 3006.54,1681.45 3006.54,1665.7 3037.4,1634.84 CBATT3.2 ; ROV1.2 2869.09,903.94 v1(2869.09,859.25) ; CSTOR.1 2956.13,1324.83 2971.48,1324.83 v1(2989.17,1342.52) 2986.57,1345.13 2967.28,1345.13 2960.75,1351.65 2958.58,1351.65 2947.24,1362.99 CBYP.1 ; ROK1.1 3065.35,857.48 3076.69,868.82 3093.93,868.82 3105.19,880.09 v1(3108.88,880.09) ; COUT.2 3130.31,1179.13 v1(3173.23,1179.13) ; v1(3144.68,376.97) v1(3144.68,437.99) ; v1(3147.64,919.29) 3147.64,950.2 ROUT1.2 ; C14.1 3159.68,691.34 3171.01,702.68 3171.01,725.4 3175.2,729.58 v1(3175.2,733.27) ; R11.1 3216.14,695.08 3177.95,733.27 v1(3175.2,733.27) ; C12.1@3216.14,736.58 3182.2,736.58 3178.88,733.27 v1(3175.2,733.27) ; v1(3246.06,551.18) 3255.54,541.7
  other v1: 317.91,48.23 2757.87,62.99 2037.6,118.11 1738.22,162.01 62.99,313.98 1431.1,313.98 1196.85,314.96 1664.37,531.5 2582.68,639.76 1340.55,760.83 3808.07,899.61 2163.39,902.56 3304.13,916.34 3290.35,1077.76 2894.68,1137.8 2933.07,1137.8 2894.15,1175.73 2932.62,1175.73 3289.37,1242.13 203.54,1420.47 3812.01,1462.6 1941.93,1698.82 2688.98,1698.82 3503.94,1706.69 1223.43,1716.54 565.94,1719.49
LA: P9.2 R13.1 R15.2 | length 409.3
  Top Layer w10: R15.2 3489.16,329.1 3516.66,301.6 3572.5,301.6 3597.83,326.94 R13.1 3680.09,329.1 P9.2
NetC3_1: C3.1 IC1.5 P3.1 R2.2 | length 845.3
  Top Layer w19.68: P3.1 814.2,280.71 814.2,325.76 R2.2 805.45,334.51 805.45,490.49 1044.29,729.33 1044.29,800.2 1025.2,819.29 C3.1 975.17,819.29 959.81,834.65 IC1.5
NetC5_1: C5.1 IC2.3 P4.1 R3.1 | length 725.9
  Top Layer w19.68: C5.1 173.82,780.31 228.68,780.31 235.08,773.92 241.09,773.92 242.99,772.01 266.97,772.01 269.66,769.33 299.64,769.33 330.71,738.26 330.71,685.04 305.45,659.78 305.45,417.9 325.39,397.95 R3.1 325.39,283.1 P4.1
NetC6_1: C6.1 IC2.4 | length 100.7
  Top Layer w19.68: C6.1@171.65,735.24 242.16,735.24 252,745.08 IC2.4
NetC9_1: C9.1 D4.3 L3.1 | length 146.3
  Top Layer w10: C9.1 L3.1 2463.98,1618.9 2508.57,1574.3 2508.57,1563.9 D4.3
NetC9_2: C9.2 D3.3 L3.2 P6.1 | length 252.9
  Top Layer w10: D3.3 2370.85,1564.88 2370.85,1577.74 2412.01,1618.9 L3.2 C9.2 2412.01,1684.25 2439.96,1712.2 P6.1
NetC12_2: C12.2 IC7.A3 R10.1 R11.2 | length 220
  Top Layer w6: IC7.A3 3328.74,579.3
  Top Layer w10: C12.2@3268.11,736.58 R10.1 3268.11,639.93 3328.74,579.3
NetC15_1: C15.1 IC7.A4 R17.2 | length 162.2
  Top Layer w6: IC7.A4 3344.49,604.89
  Top Layer w10: 3344.49,604.89 3379.53,639.93 C15.1 R17.2@3379.53,689.34
NetC15_2: C15.2 IC7.A5 | length 129.9
  Top Layer w6: IC7.A5 3431.5,612.96
  Top Layer w10: 3431.5,612.96 C15.2
NetC16_1: C16.1 IC7.C4 R19.1 | length 452.5
  Top Layer w4: IC7.C4 3344.49,510.26 v2(3349.9,515.73) v2(3349.9,515.73)
  Top Layer w10: R19.1 C16.1 3199.41,277.73 3224.75,252.39 3284.41,252.39 3317.06,285.03 3317.06,359.93 3308.09,368.9 v1(3308.09,436.59)
  Bottom Layer w4: 3349.83,479.76 3349.9,479.83 v2(3349.9,515.73)
  Bottom Layer w6: v1(3308.09,436.59) 3308.09,438.01 3349.83,479.76
NetC16_2: C16.2 IC7.D5 R16.1 R19.2 | length 443.3
  Top Layer w10: C16.2 3251.38,282.06 3262.72,293.4 3264.88,293.4 3273.01,301.53 3294.64,301.53 v1(3297.24,304.13) 3285.78,315.6 3262.72,315.6 3251.38,326.94 R19.2 ; IC7.D5 3360.24,409.55 3332.68,381.99 v1(3332.68,272.64) 3369.32,272.64 R16.1
  Bottom Layer w10: v1(3297.24,304.13) 3299.21,304.13 3330.71,272.64 v1(3332.68,272.64)
NetC17_1: C17.1 IC7.C3 R21.1 | length 536.7
  Top Layer w4: IC7.C3 3328.74,510.29 3334.36,515.91 v2(3334.36,516)
  Top Layer w10: v1(3482.28,433.07) 3554.13,433.07 3586.02,464.96 C17.1
  Bottom Layer w4: 3333.93,496.52 3334.36,496.95 v2(3334.36,516)
  Bottom Layer w5: 3333.93,496.52 3334.65,495.81
  Bottom Layer w6: 3334.65,495.81 3282.48,443.64 3282.48,424.21 3299.31,407.39 3424.98,407.39 3452.64,435.04 3480.31,435.04 v1(3482.28,433.07)
NetC17_2: C17.2 IC7.D3 R20.1 | length 394.7
  Top Layer w10: IC7.D3 3328.74,464.13 3333.66,459.21 v1(3333.66,425.2) v1@3331.39,427.46 ; C17.2 3532.71,542.32 v1(3488.19,542.32) 3488.19,544.85 3534.06,590.72 R20.1
  Bottom Layer w10: v1(3333.66,425.2) 3452.14,543.67 3486.84,543.67 v1(3488.19,542.32)
NetC18_2: C18.2 R18.1 R20.2 | length 654.2
  Top Layer w10: C18.2 3201.77,489.93 v1(3201.77,527.56) ; R20.2 R18.1 3587.6,643.67 v1(3587.6,688.98)
  Bottom Layer w10: v1(3201.77,527.56) 3200.79,528.54 3200.79,581.69 3347.44,728.35 3548.23,728.35 v1(3587.6,688.98)
NetCBATT1_1: CBATT1.1 CBATT2.1 CBATT3.1 IC8.18 | length 586.8
  Top Layer w10: IC8.18 2914.29,1224.33 2914.29,1246.97 2930.12,1262.8
  Top Layer w19.68: CBATT1.1 CBATT2.1 CBATT2.1@2965.58,1528.54 ; 2930.12,1262.8 2947.34,1280.02 2983.73,1280.02 3013.83,1310.12 3013.83,1480.3 CBATT2.1@2965.58,1528.54 ; CBATT3.1 CBATT2.1@2965.58,1528.54
NetCREF_2: CREF.2 IC8.4 | length 203.1
  Top Layer w10: 2803.66,1121.54 2803.66,1126.73 2813.74,1136.81 IC8.4
  Top Layer w19.68: CREF.2 2711.02,1027.76 2717.52,1034.25 2745.87,1034.25 2803.66,1092.04 2803.66,1121.54
NetD1_2: D1.2 R2.1 | length 92.7
  Top Layer w19.68: R2.1 864.57,327.36 953.35,327.36 D1.2
NetD2_2: D2.2 R3.2 | length 89.5
  Top Layer w19.68: R3.2 378.74,327.36 464.34,327.36 D2.2
NetIC1_4: IC1.4 R1.2 | length 81.6
  Top Layer w10: R1.2 885.24,743.5 901.57,759.84 IC1.4
NetIC3_1: IC3.1 OSC1.3 | length 129.6
  Top Layer w10: OSC1.3 2105.31,283.46 2140.75,248.03 IC3.1
NetIC3_4: IC3.4 IC4.2 | length 101.5
  Top Layer w10: IC3.4 2285.43,173.23 2312.09,199.88 2331.77,199.88 IC4.2
NetIC4_4: IC4.4 P5.1 | length 142.2
  Top Layer w10: IC4.4 2449.8,169.29 2456.61,162.48 2456.61,153.62 2504.75,105.49 2504.75,86.79 P5.1
NetIC5_1: IC5.1 J2.1 P7.1 | length 1318.2
  Top Layer w10: IC5.1 1720.47,784.45 1889.71,953.69 1889.71,1230.64 1932.44,1273.37 2365.99,1273.37 2389.71,1249.65 2389.71,1245.88 2402.72,1232.87 P7.1 J2.1
NetIC6_2: IC6.2 R8.1 R9.1 | length 184.7
  Top Layer w10: IC6.2 2269.69,698.43 2286.61,681.5 R9.1 R8.1
NetIC7_B4: IC7.B4 R17.1 R18.2 | length 351.5
  Top Layer w4: IC7.B4 3344.72,525.95 v2(3349.77,531)
  Top Layer w10: R17.1 3432.48,693.9 3484.42,693.9 3534.06,644.26 R18.2
  Bottom Layer w4: 3348.98,560.59 3349.77,559.81 v2(3349.77,531)
  Bottom Layer w6: 3348.98,560.59 v1(3482.28,693.9)
NetIC7_B5: IC7.B5 R15.1 | length 229.7
  Top Layer w6: IC7.B5 3368.34,525.95 3401.91,492.38
  Top Layer w7.87: R15.1@3388.44,342.61 3401.91,356.08 3401.91,492.38
  Top Layer w10: R15.1 3376.57,331.27 3387.91,342.61 R15.1@3388.44,342.61
NetIC7_C5: IC7.C5 R14.1 | length 141
  Top Layer w6: IC7.C5 3364.29,510.21 3376.57,497.92
  Top Layer w10: R14.1 3376.57,497.92
NetIC7_D2: IC7.D2 R21.2 R22.1 | length 544.2
  Top Layer w10: R22.1 3251.38,412.06 3255.91,416.59 v1(3255.91,420.28) 3312.99,477.36 IC7.D2 ; R21.2 3535.43,493.08 v1(3535.43,456.69)
  Bottom Layer w10: v1(3255.91,420.28) 3297.86,378.32 3516.43,378.32 3535.43,397.31 v1(3535.43,456.69)
NetIC8_3: IC8.3 ROC1.1 ROC2.2 | length 198.1
  Top Layer w10: 2802.17,1153.54 2805.12,1156.5 IC8.3
  Top Layer w19.68: ROC1.1 ROC2.2 2772.64,1124.02 2802.17,1153.54
NetIC8_6: IC8.6 P13.2 | length 681.3
  Top Layer w10: v1(2872.76,1049.21) 2873.03,1049.48 2873.03,1074.96 2873.11,1075.04 2873.11,1088.66 IC8.6
  Bottom Layer w10: v1(2872.76,1049.21) 3039.6,1049.21 3042.55,1046.26 3205.71,1046.26 P13.2
NetIC8_7: IC8.7 ROV1.1 ROV2.1 | length 218.1
  Top Layer w10: ROV1.1 ROV2.1 2816.54,955.91 2827.87,967.24 2830.04,967.24 2893.57,1030.78 IC8.7@2893.57,1089.44
NetIC8_8: IC8.8 ROK3.2 ROUT2.2 ROV2.2 | length 460.9
  Top Layer w10: ROV2.2 2868.5,955.91 2913.39,1000.79 ; IC8.8 2913.39,1000.79 ; ROK3.2 3013.39,955.91 3002.05,967.24 2999.88,967.24 v1(2966.34,1000.79) 2913.39,1000.79
  Bottom Layer w10: v1(2966.34,1000.79) 2967.42,1001.87 3150.1,1001.87 v1(3151.18,1002.95)
NetIC8_10: IC8.10 ROK2.2 ROK3.1 | length 231.7
  Top Layer w10: IC8.10 2952.76,1077.76 3054.02,976.5 3054.02,965.08 ROK3.1 ROK2.2
NetIC8_11: IC8.11 ROK1.2 ROK2.1 | length 524
  Top Layer w10: IC8.11 2992.13,1117.13 2993.03,1116.22 2993.03,1088.66 3097.31,984.38 3097.31,941.6 3143.7,895.21 3143.7,886.89 3081.61,824.8 3041.73,824.8 3013.39,853.15 ROK1.2 ROK2.1
NetIC8_12: IC8.12 ROUT1.1 ROUT2.1 | length 328.8
  Top Layer w10: IC8.12 3071.46,1136.81 3203.15,1005.12 ROUT2.1 ROUT1.1
NetIC8_16: IC8.16 L2.1 | length 187.2
  Top Layer w19.68: 2959.65,1232.28 2971.46,1232.28 3022.64,1283.46 3062.01,1283.46 3077.76,1299.21 L2.1
NetIC8_20: IC8.20 L1.1 | length 187.4
  Top Layer w10: 2859.25,1249.02 2860.24,1249.02 2874.02,1235.24 IC8.20
  Top Layer w19.68: L1.1 2796.26,1305.12 2852.36,1249.02 2859.25,1249.02
NetJ2_3: J2.3 P7.3 | length 196.9
  Top Layer w10: J2.3 P7.3
NetJ2_6: J2.6 P7.6 | length 196.9
  Top Layer w10: J2.6 P7.6
NetJ2_7: J2.7 P7.7 | length 196.9
  Top Layer w10: J2.7 P7.7
NetJ2_8: J2.8 P7.8 | length 196.9
  Top Layer w10: J2.8 P7.8
NetJ2_9: J2.9 P7.9 | length 196.9
  Top Layer w10: J2.9 P7.9
NetJ2_10: J2.10 P7.10 | length 196.9
  Top Layer w10: J2.10 P7.10
NetJ2_11: J2.11 P7.11 | length 196.9
  Top Layer w10: J2.11 P7.11
NetJ2_12: J2.12 P7.12 | length 196.9
  Top Layer w10: J2.12 P7.12
NetJ2_13: J2.13 P7.13 | length 196.9
  Top Layer w10: J2.13 P7.13
NetJ2_14: J2.14 P7.14 | length 196.9
  Top Layer w10: J2.14 P7.14
NetJ2_17: J2.17 P7.17 | length 196.9
  Top Layer w10: J2.17 P7.17
NetJ2_18: J2.18 P7.18 | length 196.9
  Top Layer w10: J2.18 P7.18
NetJ2_19: J2.19 P7.19 | length 196.9
  Top Layer w10: J2.19 P7.19
NetJ2_20: J2.20 P7.20 | length 196.9
  Top Layer w10: J2.20 P7.20
NetJ2_21: J2.21 P7.21 | length 196.9
  Top Layer w10: J2.21 P7.21
NetJ2_22: J2.22 P7.22 | length 196.9
  Top Layer w10: J2.22 P7.22
NetJ2_23: J2.23 P7.23 | length 196.9
  Top Layer w10: J2.23 P7.23
NetJ3_2: J3.2 P8.1 R5.1 | length 2474.9
  Top Layer w10: R5.1 1221.65,1334.25 1260.32,1372.91 1270.16,1372.91 1282.48,1385.24 v1(1282.48,1425.2) ; v1(2522.64,551.18) 2903.91,169.91 P8.1
  Bottom Layer w10: v1(1282.48,1425.2) 1614.16,1425.2 1808.72,1230.64 1808.72,1216.1 1888.13,1136.68 1888.13,1042.06 2379.01,551.18 v1(2522.64,551.18)
NetJ5_1: J5.1 P10.1 Q1.1 Q1.2 Q1.5 Q1.6 | length 351.1
  Top Layer w10: J5.1 2843.06,635.68 2913.18,635.68 2922.1,644.61 2922.1,646.84 2922.32,647.06 2922.32,650.08 Q1.2 Q1.1 ; Q1.2@2926.18,650 2926.18,645 Q1.5 Q1.6 2985.24,568.5 P10.1
NetOSC1_1: OSC1.1 P1.1 | length 235.2
  Top Layer w10: P1.1 1687.2,95.47 1814.96,95.47 OSC1.1
NetR4_2: R4.2 R5.2 R6.1 | length 122.5
  Top Layer w10: R4.2 R6.1 1218.5,1387.2 R5.2
RA: P9.1 R12.1 R14.2 | length 430.3
  Top Layer w10: R14.2 3491.35,378.32 3518.86,405.82 3572.5,405.82 3597.83,380.48 R12.1 3629.3,378.32 P9.1
RL: P9.3 R16.2 | length 364.2
  Top Layer w10: R16.2 3730.88,279.89 P9.3
VBatt_OK: IC6.3 IC8.13 P13.1 | length 1789.7
  Top Layer w10: IC6.3 2252.64,748.23 2693.7,748.23 v1(2693.9,748.03) ; IC8.13 3070.06,1156.5 3074.14,1152.42 3230.16,1152.42 3240.54,1162.8 P13.1
  Bottom Layer w10: v1(2693.9,748.03) 3007.48,748.03 P13.1
Vin: C2.1 C4.1 IC1.1 IC1.3 IC2.1 IC2.2 P2.2 R1.1 | length 1757.4
  Top Layer w10: v1(686.02,901.57) 686.02,871.49 727.67,829.84 727.67,827.68 739.01,816.34 C2.1 780.91,816.34 799.21,834.65 IC1.1 816.93,834.65 837.74,813.83 837.74,780.65 IC1.3@816.93,759.84 ; IC1.3 IC1.3@816.93,759.84 ; R1.1 833.27,743.5 IC1.3@816.93,759.84
  Top Layer w19.68: C4.1@171.65,829.72 241.44,829.72 249.31,821.85 IC2.1 ; IC2.2 IC2.1 ; v1(287.4,903.54) 268.31,884.46 IC2.1
  Bottom Layer w39.37: P2.2 70.87,1514.08 126.05,1458.9 126.05,1350.47 94.03,1318.45 94.03,1015.39 206.87,902.56 v1@682.09,902.56
VSTOR: CBYP.2 CSTOR.2 IC8.19 P13.3 | length 730.7
  Top Layer w10: IC8.19 2893.7,1314.37 CSTOR.2 v1(2895.28,1365.16)
  Bottom Layer w10: v1(2895.28,1365.16) 2968.11,1437.99 3347.05,1437.99 P13.3
pads on no net: IC4.1 IC6.1 IC6.4 IC6.8 IC7.D4 IC8.9 IC8.17 J1.1 J1.2 J1.3 J1.4 J1.5 J1.6 J1.7 J1.8 J1.9 J1.10 J1.11 J1.12 J1.13 J1.14 J1.15 J1.16 J1.17 J1.18 J1.19 J1.20 J1.21 J1.22 J1.23 M1.1 M2.1 M3.1 M4.1

## Polygon pours and split planes (outlines as drawn)
GND on Top Layer "GND_L01_P002" (solid, remove dead copper, pour order 2): 0,1890.75 3898.62,1890.75 3898.62,0 0,0
GND on Bottom Layer "GND_L02_P000" (solid, remove dead copper, pour order 0): 0,1890.75 3898.62,1890.75 3898.62,0 0,0

## Other copper
Top Layer:
  pour cut-out: 2358.27,1844.49 2516.73,1844.49 2516.73,1592.52 2361.22,1592.52 2361.22,1595.47
  pour cut-out: 1717.52,370.08 2592.52,370.08 2592.52,0 1716.53,0
  pour cut-out: 3119.56,772.64 3678.15,772.64 3678.15,237.2 3118.57,237.2
  pour cut-out: 2623.52,1472.44 3236.71,1472.44 3236.71,829.72 2624.51,829.72

## Silkscreen, mask and mechanical layers (free items; w line width, h text height)
Top Overlay:
  lines w9.84: 830.71,1364.17 819.88,1375 819.88,1449.8 861.22,1491.14 861.22,1566.93 ; 1080.71,146.65 1080.71,163.39 1097.44,180.12 1196.85,180.12 ; 1277.56,181.1 1375,181.1 1387.8,168.31 1387.8,150.59 ; 1281.5,1571.85 1281.5,1511.81 1331.69,1461.61 1331.69,1373.03 1317.91,1359.25 ; 1595.47,631.89 1609.25,631.89 1622.05,644.68 ; 1725.39,815.94 1753.94,844.49 1753.94,862.2 ; 1953.74,624.02 1953.74,646.65 1979.33,672.24 ; 2306.1,771.65 2321.85,787.4 2355.31,787.4 ; 2449.8,274.61 2466.54,291.34 2471.46,291.34 ; 2473.43,686.02 2533.46,686.02 ; 2558.07,1615.16 2574.8,1615.16 2584.65,1625 ; 2561.02,1541.34 2579.72,1560.04 2598.43,1560.04 ; 2561.02,1696.85 2575.79,1696.85 2584.65,1687.99 ; 2743.11,617.13 2798.23,617.13 ; 2787.4,627.95 2798.23,617.13 ; 2787.89,606.79 2798.23,617.13
  text "BCP RX" at 2534.8,1768.7 h19.68
  text "Sensor Node V1.0 /  / Lingke & Jonathan FYP /  / 12 Feb 2022" at 1402.74,1697.83 h19.68
  text "6 <= Vin <= 9V" at 225.39,1641.06 h19.68 r270
  text "Resonant Tank" at 2594.18,1625 h19.68
  text "Close to by pass ADC Scaler" at 1370.08,1595.83 h19.68 r90
  text "Vin" at 166.34,1593.15 h19.68 r270
  text "Close to by pass ADC Scaler" at 926.18,1584.01 h19.68 r90
  text "Rectifier" at 2561.72,1544.29 h19.68
  text "Nano Watt Energy Harvester" at 3193.6,1532.48 h19.68
  text "GND" at 163.39,1495.71 h19.68 r270
  text "BCP Vin After Rectifier" at 2263.78,1435.38 h19.68 r90
  text "GND" at 2126.97,1405.53 h19.68 r90
  text "VSTOR" at 3449.84,1306.1 h19.68
  text "VOUT_EN" at 3497.4,1229.33 h19.68
  text "VBATT_OK" at 3487.56,1136.81 h19.68
  text "Unmodulated Data" at 1715.26,850.39 h19.68
  text "ECG Sensor Block" at 3371.14,792.32 h19.68
  text "VBatt_OK" at 2370.76,769.69 h19.68
  text "Vref" at 2511.51,671.26 h19.68
  text "5V LDO" at 268.07,658.46 h19.68
  text "Ctrl Signal" at 1330.1,619.09 h19.68
  text "3V3 LDO" at 775.94,592.52 h19.68
  text "3V3" at 1905.7,585.63 h19.68
  text "Lvl shifter" at 1614.53,565.94 h19.68
  text "USB Face Here" at 212.6,551.52 h19.68 r90
  text "Comparator" at 2059.74,548.23 h19.68
  text "RA" at 3845.81,505.91 h19.68
  text "BCP RX Power" at 2714.57,498.03 h19.68
  text "Instruction at the back" at 3868.11,453.67 h19.68 r90
  text "LA" at 3845.81,407.48 h19.68
  text "ECG Power In" at 2717.03,394.68 h19.68
  text "Close the jumper to don't use Q1" at 2713.58,325.86 h19.68 r90
  text "RL" at 3845.81,304.13 h19.68
  text "LDO 3V3" at 2758.9,288.39 h19.68
  text "5V" at 2406.2,276.57 h19.68
  text "3V3 En" at 1039.72,217.52 h19.68
  text "GND" at 1157.83,166.34 h19.68
  text "BCC TX" at 2531.85,149.61 h19.68
  text "OSC En" at 1548.23,114.53 h19.68 r90
  text "5V En" at 294.29,100.75 h19.68 r90
  text "ECG SDN" at 3332.05,67.91 h19.68
  text "ECG Out" at 3021.02,55.12 h19.68
  text "3V3" at 913.39,44.96 h19.68 r90
  text "5V" at 427.17,42.5 h19.68 r90
Bottom Overlay:
  text "- Connect Vout_en to VSTOR to always enable / - Connect Vout_en to VBATT_OK to only enable when voltage of VBATT is charged to 5V" at 3838.05,1467.52 h19.68
  text "Operation Sequence: /  / 1. BCP RX receive power till VBATT OK is OK / 2. Notify FPGA through comparator & start powering ECG / 3. FPGA gather ECG data / 4. Send gathered ECG data continously for a fixed period, then stop /  / Repeat 1~4 again" at 1948.15,1455.71 h19.68
Board Outline:
  the board outline again, w9.84

## Text inside footprints (layer, text, board x,y; h text height)
D1: Top Overlay "+" at 903.54,337.8 h19.68 r270
D2: Top Overlay "+" at 414.54,337.8 h19.68 r270
IC2: Top Overlay ">" at 216.54,811.02 h19.68
J1: Top Overlay "10" at 1539.37,336.61 h19.68; Top Overlay "1" at 2448.82,340.55 h19.68; Top Overlay "24" at 126.97,333.66 h19.68
J2: Top Overlay "10" at 1537.4,933.07 h19.68; Top Overlay "1" at 2448.82,939.96 h19.68; Top Overlay "24" at 133.86,1103.35 h19.68
P7: Top Overlay "24" at 133.86,1137.8 h19.68; Top Overlay "10" at 1539.37,1136.81 h19.68; Top Overlay "1" at 2445.87,1139.76 h19.68